# Altium PCB toothxDev.PcbDoc
Units mm, origin at the board's own origin, x right, y up, seen from the top; angles counter-clockwise.
Board outline 90 x 90 mm, 2 copper layers (Top Layer, Bottom Layer); 46 components, 35 nets, 173 pads, 28 vias.
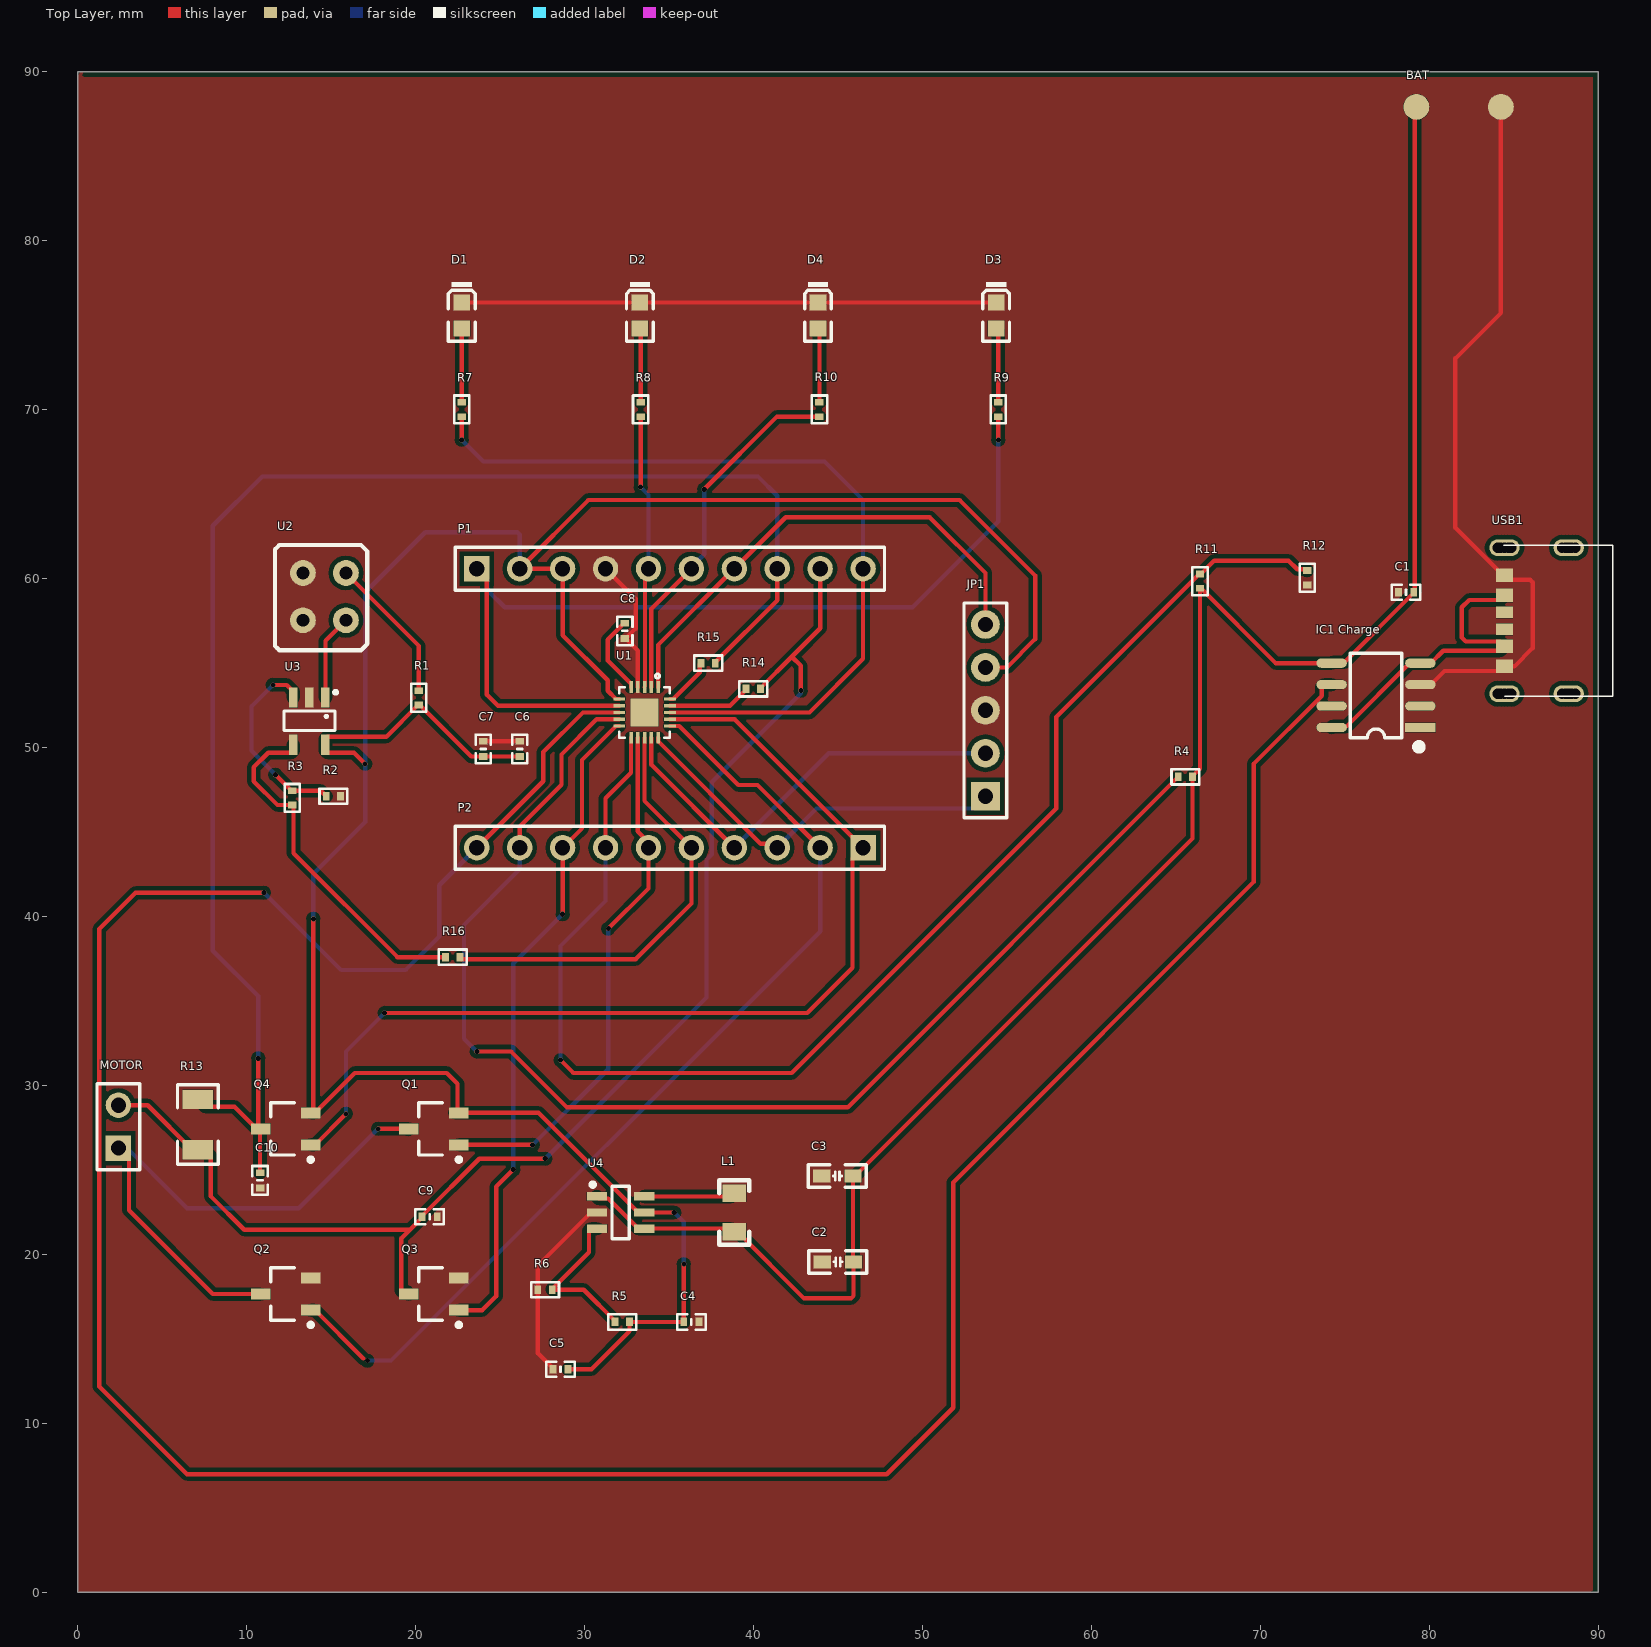
[diagram p0: Top Layer view]
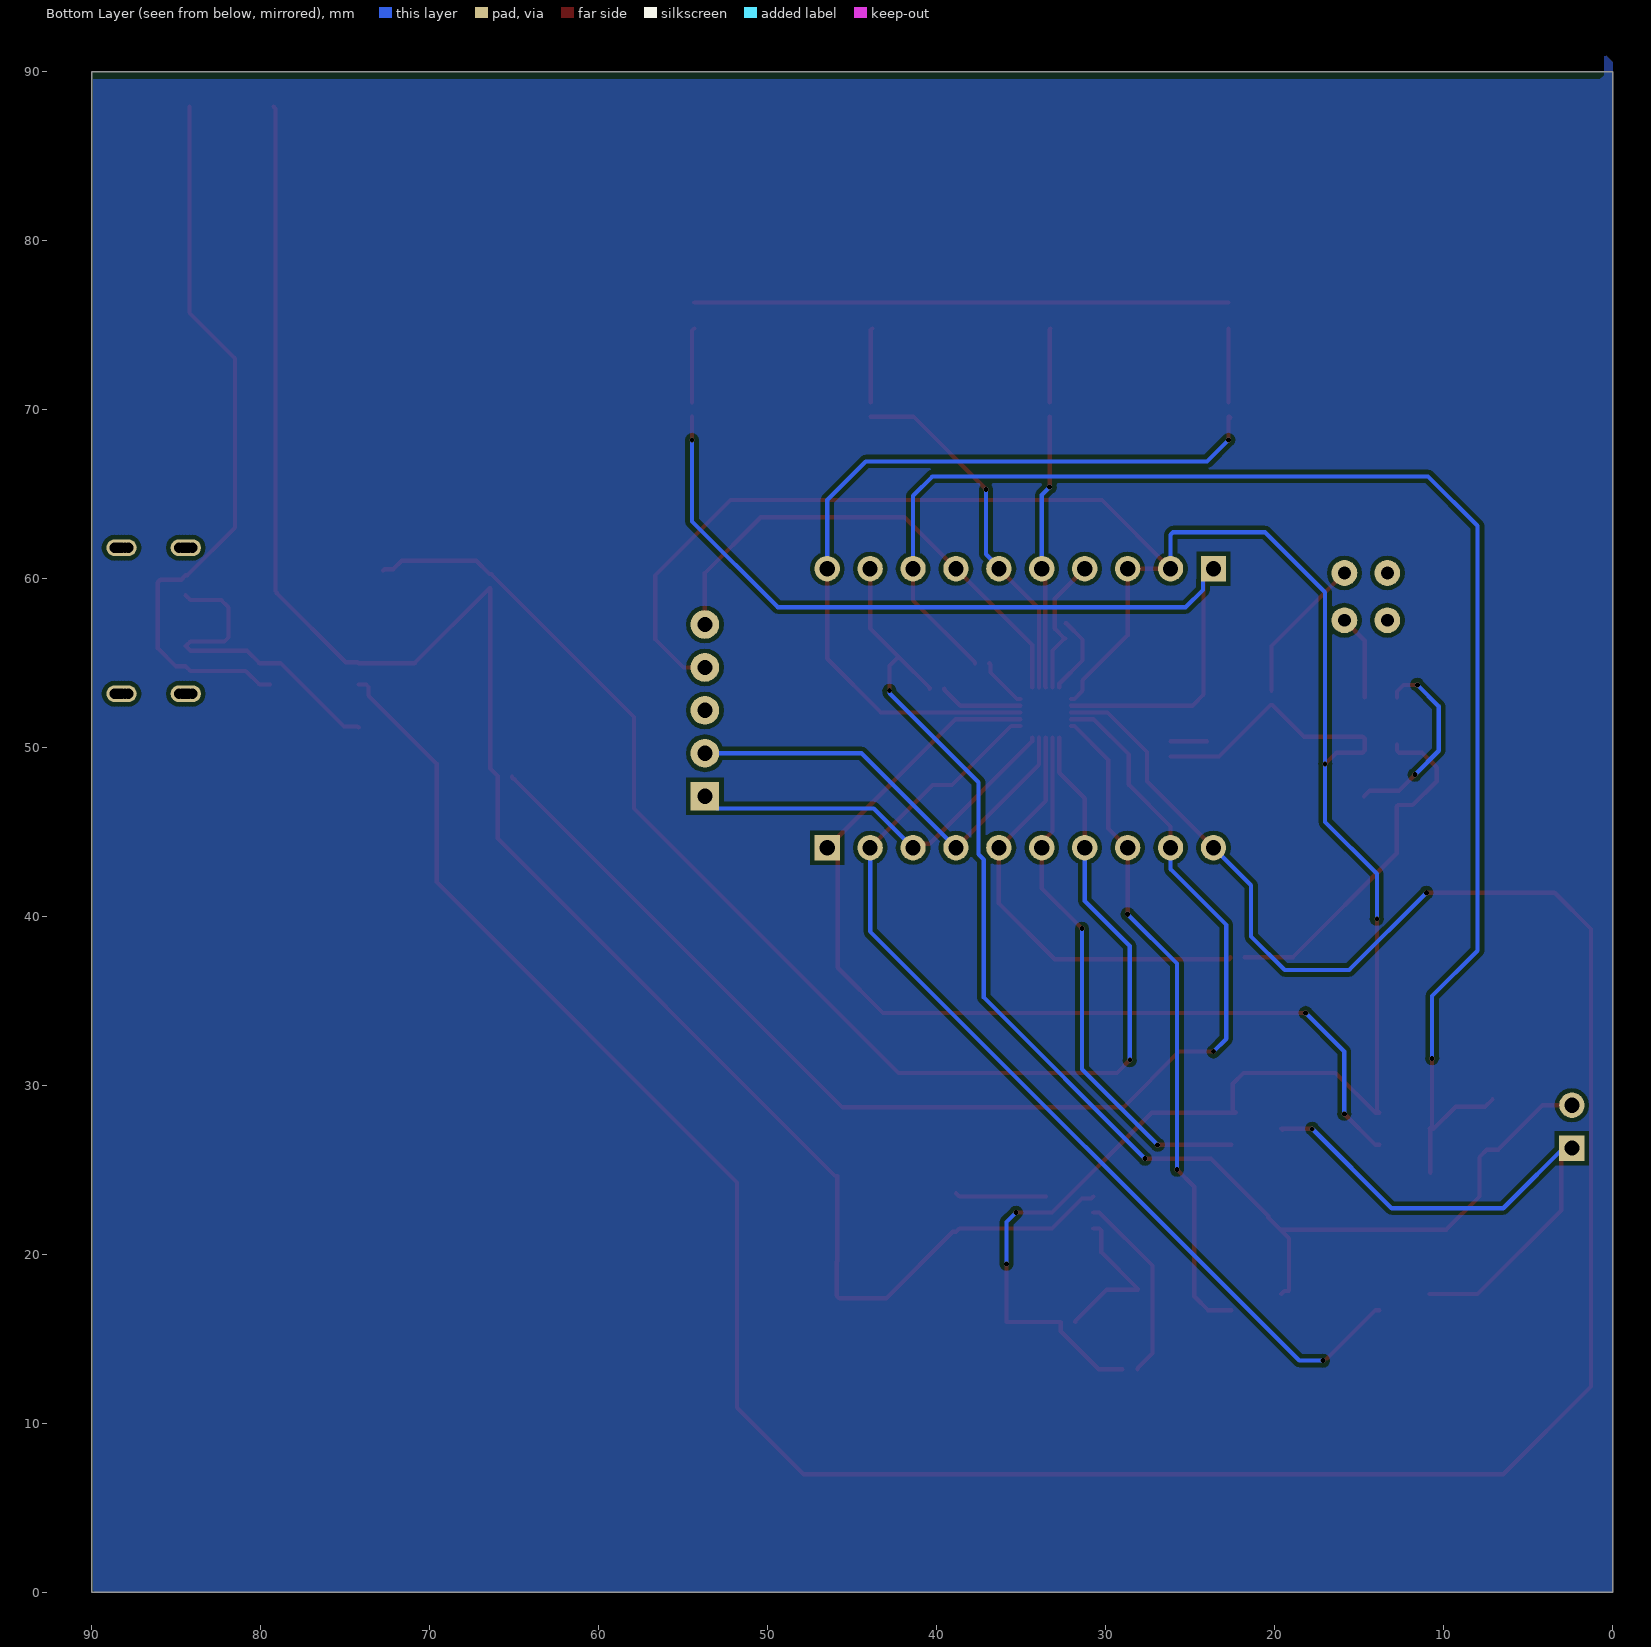
[diagram p1: Bottom Layer view, seen from below]

## Layer stack, top to bottom
Top Solder: solder mask 0.0102, Solder Resist, Dk 3.5
Top Layer: signal copper 0.0356
Dielectric 1: dielectric 0.32, FR-4, Dk 4.8
Bottom Layer: signal copper 0.0356
Bottom Solder: solder mask 0.0102, Solder Resist, Dk 3.5

## Board outline
0,0 90,0 90,90 0,90

## Design rules (kind name [scope] priority, off if disabled: settings)
Clearance [All] p1: gap=0.254 ignorepadtopadclearanceinfootprint=FALSE except(0: Arc-Arc Arc-Track Arc-SMDPad Arc-Hole Track-Track Track-SMDPad Track-Hole SMDPad-SMDPad SMDPad-THPad SMDPad-Via SMDPad-Fill SMDPad-Poly SMDPad-Region SMDPad-Text SMDPad-Hole THPad-Hole Via-Hole Fill-Hole Poly-Hole Region-Hole Text-Hole)
PolygonConnect [All] p1: connectstyle=Direct reliefconductorwidth=0.254 reliefentries=4 polygonreliefangle="90 Angle" airgapwidth=0.254
RoutingVias [All] p1: holewidth=0.711 width=1.27 viastyle="Through Hole" minholewidth=0.711 minwidth=1.27 maxholewidth=0.711 maxwidth=1.27
SolderMaskExpansion [All] p1: expansion=0.102
Width [All] p1: maxlimit=0.254 minlimit=0.254 preferedwidth=0.254
30 further rules are at their usual default settings.

## Components (designator, comment, footprint, x,y, rotation, side; value= is the part's Value field where it differs from the comment)
BAT "Header 2" POWER 79.226,87.909 r0 top
C1 "10uF" "C 0402_L" 78.613,59.182 r0 top
C2 "10uF" "C 0603_M" 44.991,19.558 r0 top
C3 "0.1uF" "C 0603_M" 44.958,24.638 r0 top
C4 "0.1uF" "C 0402_L" 36.322,16.002 r180 top
C5 "22uF" "C 0402_L" 28.575,13.208 r0 top
C6 "1uF" "C 0402_L" 26.162,49.911 r270 top
C7 "10nF" "C 0402_L" 24.003,49.911 r270 top
C8 "47nF" "C 0402_L" 32.385,56.896 r270 top
C9 "100nF (104) 10% 50V" "C 0402_L" 20.828,22.225 r180 top
C10 "100nF (104) 10% 50V" "C 0402_L" 10.795,24.384 r90 top
D1 "白灯 0603" 0603_LED_S1 22.733,75.565 r270 top
D2 "白灯 0603" 0603_LED_S1 33.274,75.565 r270 top
D3 "白灯 0603" 0603_LED_S1 54.356,75.565 r270 top
D4 "白灯 0603" 0603_LED_S1 43.815,75.565 r270 top
"IC1 Charge" "TP4056" SOP8_N 76.835,53.086 r180 top
JP1 "HDR-1X5" HDR2.54-M-LI-5P 53.721,52.197 r90 top
L1 "10uH" "L 0805" 38.862,22.479 r90 top
MOTOR "HDR-1X2" HDR1X2 2.413,26.289 r90 top
P1 "Header 10" HDR1X10 23.622,60.579 r0 top
P2 "Header 10" HDR1X10 46.482,44.069 r180 top
Q1 "AO3401A P道沟 X13A15 SOT-23" SOT-23-3L 21.082,27.432 r0 top
Q2 "AO3400A N道沟 X0YV1T SOT-23" SOT-23-3L 12.319,17.653 r0 top
Q3 "AO3400A N道沟 X0YV1T SOT-23" SOT-23-3L 21.082,17.653 r0 top
Q4 "AO3401A P道沟 X13A15 SOT-23" SOT-23-3L 12.319,27.432 r0 top
R1 "100Ω (1000) ±1%" "R 0402_L" 20.193,52.959 r270 top
R2 "10K" "R 0402_L" 15.113,47.117 r0 top
R3 "90K" "R 0402_L" 12.7,46.99 r90 top
R4 "10K" "R 0402_L" 65.532,48.26 r0 top
R5 "525K" "R 0402_L" 32.258,16.002 r180 top
R6 "100K" "R 0402_L" 27.686,17.907 r180 top
R7 "100Ω (1000) ±1%" "R 0402_L" 22.733,69.977 r90 top
R8 "100Ω (1000) ±1%" "R 0402_L" 33.316,69.977 r90 top
R9 "100Ω (1000) ±1%" "R 0402_L" 54.483,69.977 r90 top
R10 "100Ω (1000) ±1%" "R 0402_L" 43.9,69.977 r90 top
R11 "10K" "R 0402_L" 66.421,59.817 r90 top
R12 "10K" "R 0402_L" 72.771,60.071 r270 top
R13 "0.1Ω (R100) ±1%" 1206_R 7.112,27.686 r270 top
R14 "330Ω (3300) ±1%" "R 0402_L" 40.005,53.467 r180 top
R15 "330Ω (3300) ±1%" "R 0402_L" 37.338,54.991 r180 top
R16 "10K" "R 0402_L" 22.225,37.592 r180 top
U1 "HC32L110_QFN20" WFQFN20-0R4-3X3ER1R65X1R65 33.552,52.07 r270 top
U2 "ITR2001-T" ITR2000 13.335,60.325 r270 top
U3 "LMV321IDBVRG4" SOT23-5N 13.716,51.562 r180 top
U4 "FP6715" SOT23-6N 32.131,22.479 r270 top
USB1 "TYPEC1" TYPE_C_6PIN 86.341,57.5 r90 top

## Footprints (in the part's own frame and the unit in brackets; to place one, negate y for a bottom-side part, rotate by r counter-clockwise, add the part's x,y. Pads: shape width x height; smd on the part's side, far side on the other; paste and mask are expansions set on the pad)
0603_LED_S1 [mm]
  rect 0.93x0.98 smd: A(0.77,0) K(-0.77,0)
  silkscreen extent -1.98,-0.79 1.54,0.79, body extent -0.8,-0.4 0.8,0.4, height 0.6
1206_R [mm]
  rect 1.13x1.8 smd: 1(-1.49,0) 2(1.49,0)
  silkscreen extent -2.35,-1.2 2.35,1.2, body extent -1.7,-0.86 1.65,0.87, height 0.85
"C 0402_L" [mm] "无极性贴片电容"
  rect 0.4x0.5 smd: 1(-0.45,0) 2(0.45,0)
  silkscreen extent -0.85,-0.45 0.85,0.45, body extent -0.5,-0.26 0.5,0.26, height 0.53
"C 0603_M" [mil] "无极性贴片电容"
  rect 40x30 smd: 1(-36.5,0) 2(36.5,0)
  silkscreen extent -67,-26 68,26, body extent -31,-16 31,16, height 32
HDR1X2 [mm] "Connector; Header; 2 Position"
  rect 1.5x1.5 hole 0.9: 1(0,0)
  round 1.5 hole 0.9: 2(2.54,0)
  silkscreen extent -1.27,-1.27 3.81,1.27
HDR1X10 [mm] "Connector; Header; 10 Position"
  rect 1.5x1.5 hole 0.9: 1(0,0)
  round 1.5 hole 0.9: 2(2.54,0) 3(5.08,0) 4(7.62,0) 5(10.16,0) 6(12.7,0) 7(15.24,0) 8(17.78,0) 9(20.32,0) 10(22.86,0)
  silkscreen extent -1.27,-1.27 24.13,1.27
HDR2.54-M-LI-5P [mm] "排母，5脚"
  rect 1.7x1.7 hole 0.9: 1(-5.08,0)
  round 1.7 hole 0.9: 2(-2.54,0) 3(0,0) 4(2.54,0) 5(5.08,0)
  silkscreen extent -6.35,-1.27 6.35,1.27, body extent -6.35,-1.27 6.35,1.27, height 8.5
ITR2000 [mil]
  round 60 hole 30: 1(0,100) 2(0,0) 3(110.24,0) 4(110.24,100)
  silkscreen extent -65,-65 180,150
"L 0805" [mil] "小功率贴片电感"
  rect 40x55 smd: 1(-45,0) 2(45,0)
  silkscreen extent -75,-35 75,35, body extent -39,-24 39,24, height 35
POWER [mil]
  round 60 smd: 1(0,0) 2(196.85,0)
"R 0402_L" [mm] "1/16W贴片电阻"
  rect 0.4x0.5 smd: 1(-0.4,0) 2(0.45,0)
  silkscreen extent -0.8,-0.45 0.85,0.45, body extent -0.5,-0.25 0.5,0.25, height 0.3
SOP8_N [mm] "5*6*1.8mm（长宽高）"
  rect 1.8x0.55 smd: 1(-2.625,1.905)
  oval 1.8x0.55 smd: 2(-2.625,0.635) 3(-2.625,-0.635) 4(-2.625,-1.905) 5(2.625,-1.905) 6(2.625,-0.635) 7(2.625,0.635) 8(2.625,1.905)
  silkscreen extent -2.69,-2.5 1.52,3.2, body extent -3,-2.5 3,2.5, height 1.9
SOT23-5N [mm] "3x1.6x1.1mm(长宽高)"
  rect 0.5x1.2 smd: 1(-0.95,-1.4) 2(0,-1.4) 3(0.95,-1.4) 4(0.95,1.4) 5(-0.95,1.4)
  silkscreen extent -1.63,-1.78 1.5,0.56, body extent -1.5,-1.4 1.5,1.4, height 1.15
SOT23-6N [mm] "3x1.6x1.1mm(长宽高)"
  rect 0.5x1.2 smd: 1(-0.95,-1.4) 2(0,-1.4) 3(0.95,-1.4) 4(0.95,1.4) 5(0,1.4) 6(-0.95,1.4)
  silkscreen extent -1.78,-1.78 1.55,0.51, body extent -1.5,-1.4 1.5,1.4, height 1.15
SOT-23-3L [mm] "http://www.aosmd.com/res/packaging_information/SOT-23-3L.pdf"
  rect 1.15x0.65 smd: 1(1.475,-0.95) 2(1.475,0.95) 3(-1.475,0)
  silkscreen extent -0.9,-1.95 1.6,1.55, body extent -0.9,-1.55 0.9,1.55, height 1.25
TYPE_C_6PIN [mm]
  round 1 hole 0.6: 1(-4.32,1.5) 1(-4.32,1.7) 1(-4.32,1.9) 1(-4.32,2.1) 1(-4.32,2.3) 2(-4.32,-2.3) 2(-4.32,-2.1) 2(-4.32,-1.9) 2(-4.32,-1.7) 2(-4.32,-1.5) 3(4.32,-2.3) 3(4.32,-2.1) 3(4.32,-1.9) 3(4.32,-1.7) 3(4.32,-1.5) 4(4.32,1.5) 4(4.32,1.7) 4(4.32,1.9) 4(4.32,2.1) 4(4.32,2.3)
  rect 0.7x1 smd: A5(-0.5,1.9) B5(0.5,1.9)
  rect 0.8x1 smd: A9(1.5,1.9) A12(2.7,1.9) B9(-1.5,1.9) B12(-2.7,1.9)
  silkscreen extent -4.47,-4.5 4.47,1.95
WFQFN20-0R4-3X3ER1R65X1R65 [mm]
  rect 0.7x0.2 smd mask+0.09: 1(-1.5,0.8) 2(-1.5,0.4) 3(-1.5,0) 4(-1.5,-0.4) 5(-1.5,-0.8) 11(1.5,-0.8) 12(1.5,-0.4) 13(1.5,0) 14(1.5,0.4) 15(1.5,0.8)
  rect 0.2x0.7 smd mask+0.09: 6(-0.8,-1.5) 7(-0.4,-1.5) 8(0,-1.5) 9(0.4,-1.5) 10(0.8,-1.5) 16(0.8,1.5) 17(0.4,1.5) 18(0,1.5) 19(-0.4,1.5) 20(-0.8,1.5)
  rect 1.65x1.65 smd: 21(0,0)
  silkscreen extent -2.29,-1.5 1.5,1.5

## Part data
BAT: "Header, 2-Pin", LatestRevisionDate=17-Jul-2002, LatestRevisionNote="Re-released for DXP Platform.", Publisher="Altium Limited"
C1 C2 C3 C4 C5 C6 C7 C8: library part C, "贴片电容"
C9 C10: library part "0603 100nF (104) 10% 50V", "贴片电容", Package=0603, SuppliersPartNumber=C14663, ComponentLink1Description=供应商, ComponentLink1URL=http://www.szlcsc.com/product/details_15331.html, Supplier=LC
D1 D2 D3 D4: library part "0603 白灯", "发光二极管", Package=0603, SuppliersPartNumber=C2290, ComponentLink1Description=供应商, ComponentLink1URL=http://www.szlcsc.com/product/details_2663.html, Supplier=LC
"IC1 Charge": "锂电池充电管理"
JP1: library part "Header 5", "5P接插件", BOM名称=5P接
L1: library part L, "小功率贴片电感"
MOTOR: library part "Header 2", "2P接插件", BOM名称=2P接
P1 P2: "Header, 10-Pin", LatestRevisionDate=17-Jul-2002, LatestRevisionNote="Re-released for DXP Platform.", Publisher="Altium Limited"
Q1 Q4: "MOS(场效应管)", Package=SOT-23, SuppliersPartNumber=C15127, ComponentLink1Description=供应商, ComponentLink1URL=http://www.szlcsc.com/product/details_15801.html, Supplier=LC
Q2 Q3: "MOS(场效应管)", Package=SOT-23, SuppliersPartNumber=C20917, ComponentLink1Description=供应商, ComponentLink1URL=http://www.szlcsc.com/product/details_21629.html, Supplier=LC
R1 R2 R3 R4 R5 R6 R7 R8 R9 R10 R11 R12 R16: library part "0603 100Ω (1000) 1%", "贴片电阻", Package=0603, SuppliersPartNumber=C22775, ComponentLink1Description=供应商, ComponentLink1URL=http://www.szlcsc.com/product/details_23502.html, Supplier=LC
R13: library part "1206 0.1Ω (R100) 1%", "贴片电阻", Package=1206, SuppliersPartNumber=C25334, ComponentLink1Description=供应商, ComponentLink1URL=http://www.szlcsc.com/product/details_26077.html, Supplier=LC
R14 R15: library part "0603 330Ω (3300) 1%", "贴片电阻", Package=0603, SuppliersPartNumber=C23138, ComponentLink1Description=供应商, ComponentLink1URL=http://www.szlcsc.com/product/details_23865.html, Supplier=LC
U2: library part Component_1
U3: library part LMV321IDBVRG4_[C7972], "运放", Package=SOT-23-5, SuppliersPartNumber=C7972, ComponentLink1Description=供应商, ComponentLink1URL=http://www.szlcsc.com/product/details_8449.html, Supplier=LC
USB1: library part Type-C-6Pin

## Via types
v1: diameter 0.3, hole 0.3, Top Layer to Bottom Layer, 24 vias
v2: diameter 1.27, hole 0.711, Top Layer to Bottom Layer, 4 vias

## Nets (pads, with @x,y where several pads share a name; then routed paths per layer and width w, separated by ;. In a path a pad name is that pad's centre, name@x,y a point inside that pad or via, vN(x,y) a via of type N, cw(c..) or ccw(c..) an arc to the next point about the centre after c; other vN are vias at no path point)
BAT: "IC1 Charge.5" BAT.1 C1.2 C2.2 C3.2 L1.1 R4.2 R11.1 U4.1 U4.4 | length 113.2
  Top Layer w0.254: U4.1 30.854,23.306 31.404,23.306 33.181,21.529 U4.4 38.669,21.529 L1.1 39.052,21.336 42.989,17.399 45.77,17.399 45.918,17.548 C2.2 45.885,19.591 C3.2 46.012,24.638 65.982,44.608 R4.2 65.982,48.31 66.421,48.749 R11.1 66.471,59.417 70.897,54.991 74.21,54.991 74.267,55.048 74.979,55.048 79.063,59.132 C1.2 79.136,59.255 79.136,87.819 BAT.1
BAT_ADC: P2.7 R11.2 R12.1 U1.11 | length 81.3
  Top Layer w0.254: v1(28.575,31.496) 29.337,30.734 42.26,30.734 57.912,46.386 57.912,51.808 66.371,60.267 R11.2 66.471,60.267 67.256,61.052 71.663,61.052 72.171,60.544 72.679,60.544 72.752,60.471 R12.1 ; P2.7 31.242,46.99 32.752,48.5 U1.11
  Bottom Layer w0.254: v1(28.575,31.496) 28.575,38.249 31.242,40.916 P2.7
GND: "IC1 Charge.3" BAT.2 C1.1 C2.1 C3.1 C4.1 C5.1 C6.1 C7.1 C8.2 C9.1 C10.1 D1.K D2.K D3.K D4.K JP1.3 P1.4 Q2.2 Q3.2 R2.2 R6.2 R12.2 U1.4 U2.2 U2.3 U3.2 U4.2 USB1.A12 USB1.B12 | length 96.8
  Top Layer w0.254: D1.K 22.758,76.335 D2.K D4.K D3.K ; C7.1 C6.1 ; C5.1 28.125,13.258 27.236,14.147 R6.2 27.236,19.334 30.381,22.479 U4.2 ; P1.4 33.02,58.801 33.02,57.031 C8.2@32.435,56.446 ; C8.2 C8.2@32.435,56.446 ; U1.4 33.152,55.729 C8.2@32.435,56.446 ; 79.46,53.721 80.085,53.721 80.891,54.527 84.168,54.527 USB1.B12 85.026,54.8 86.104,55.878 86.104,59.778 85.955,59.927 84.714,59.927 USB1.A12 84.341,60.2 81.534,63.006 81.534,73.025 84.226,75.717 BAT.2
  other v2: 13.335,57.525 13.335,60.325
ISHUNT1: C10.2 P1.8 Q4.3 R13.1 R15.1 | length 90.4
  Top Layer w0.254: R13.1 7.55,28.738 9.288,28.738 10.594,27.432 Q4.3 ; v1(10.687,31.604) 10.687,27.589 Q4.3 ; C10.2 10.795,27.383 Q4.3 ; R15.1 37.738,55.041 41.402,58.705 P1.8
  Bottom Layer w0.254: v1(10.687,31.604) 10.687,35.287 8.001,37.973 8.001,63.119 10.922,66.04 40.259,66.04 41.402,64.897 P1.8
ISHUNT2: C9.2 MOTOR.2 P1.9 Q3.3 R13.2 R14.1 | length 80.5
  Top Layer w0.254: MOTOR.2 4.144,28.829 6.777,26.196 R13.2 7.447,26.196 7.885,25.758 7.885,23.434 9.856,21.463 19.666,21.463 ; Q3.3 19.431,17.829 19.181,17.829 19.159,17.851 19.159,20.956 19.666,21.463 ; C9.2@20.378,22.175 19.666,21.463 ; C9.2 20.378,22.275 23.769,25.666 v1(27.674,25.666) ; R14.1 40.405,53.517 42.26,55.372 ; v1(42.799,53.359) 42.799,54.833 42.26,55.372 ; P1.9 43.942,57.054 42.26,55.372
  Bottom Layer w0.254: v1(27.674,25.666) 37.211,35.203 37.211,43.359 37.529,43.676 37.529,47.943 42.799,53.213 v1(42.799,53.359)
ITRADC: P2.5 R16.1 U1.13 | length 26.1
  Top Layer w0.254: R16.1 22.625,37.542 22.698,37.469 22.748,37.469 22.752,37.465 33.02,37.465 36.322,40.767 P2.5 33.552,46.839 U1.13
LED1: P1.10 R7.1 U1.18 | length 48.9
  Top Layer w0.254: R7.1@22.625,69.504 22.698,69.577 R7.1 v1(22.733,68.199) ; U1.18 43.307,52.07 46.482,55.245 P1.10
  Bottom Layer w0.254: v1(22.733,68.199) 24.003,66.929 44.196,66.929 46.482,64.643 P1.10
LED2: P1.5 R8.1 U1.3 | length 16.3
  Top Layer w0.254: v1(33.316,65.405) R8.1 ; U1.3 33.579,53.597 33.579,60.376 P1.5
  Bottom Layer w0.254: v1(33.316,65.405) 33.782,64.939 P1.5
LED3: P1.1 R9.1 U1.7 | length 56.3
  Top Layer w0.254: P1.1 24.216,59.985 24.216,53.127 24.873,52.47 U1.7 ; v1(54.483,68.199) R9.1
  Bottom Layer w0.254: P1.1 24.245,59.956 24.245,59.321 25.273,58.293 49.403,58.293 54.483,63.373 v1(54.483,68.199)
LED4: P1.6 R10.1 U1.2 | length 21.6
  Top Layer w0.254: U1.2 33.952,58.209 P1.6 ; v1(37.084,65.278) 41.383,69.577 R10.1
  Bottom Layer w0.254: P1.6 36.322,60.672 37.084,61.434 v1(37.084,65.278)
NetC8_1: C8.1 U1.5 | length 4.8
  Top Layer w0.254: C8.1 32.335,57.346 31.369,56.38 31.369,55.149 32.752,53.766 U1.5
NetD1_A: D1.A R7.2 | length 4.4
  Top Layer w0.254: R7.2 D1.A
NetD2_A: D2.A R8.2 | length 4.4
  Top Layer w0.254: D2.A 33.316,74.753 R8.2
NetD3_A: D3.A R9.2 | length 4.4
  Top Layer w0.254: D3.A 54.483,74.668 R9.2
NetD4_A: D4.A R10.2 | length 4.4
  Top Layer w0.254: D4.A 43.9,74.71 R10.2
NetL1_2: L1.2 U4.6 | length 5.4
  Top Layer w0.254: U4.6 38.669,23.429 L1.2
NetMOTOR_1: MOTOR.1 Q1.3 Q2.3 | length 35.2
  Top Layer w0.254: MOTOR.1 3.036,25.666 3.036,22.618 8.001,17.653 Q2.3 ; v1(17.78,27.432) Q1.3 Q1.3@19.558,27.383
  Bottom Layer w0.254: MOTOR.1 2.413,26.797 6.477,22.733 13.081,22.733 v1(17.78,27.432)
NetR1_1: R1.1 U2.1 | length 8.8
  Top Layer w0.254: v2(15.875,60.325) 20.193,56.007 R1.1
NetR2_1: R2.1 R3.2 U3.3 | length 11.7
  Top Layer w0.254: v1(11.557,53.702) 12.376,53.702 12.766,53.312 U3.3 ; v1(11.703,48.387) 12.65,47.44 R3.2 14.39,47.44 R2.1
  Bottom Layer w0.254: v1(11.557,53.702) 10.287,52.432 10.287,49.803 v1(11.703,48.387)
NetR3_1: R3.1 R16.2 U3.4 | length 21.2
  Top Layer w0.254: U3.4 12.766,49.812 12.643,49.689 11.277,49.689 10.414,48.826 10.414,48.006 11.83,46.59 R3.1 12.773,46.517 12.773,43.742 18.923,37.592 R16.2
NetR5_2: R5.2 R6.1 U4.3 | length 9.5
  Top Layer w0.254: U4.3 30.381,21.529 30.258,21.406 30.258,20.129 28.086,17.957 R6.1 29.953,17.907 31.808,16.052 R5.2
NetR14_2: R14.2 U1.19 | length 4.9
  Top Layer w0.254: U1.19 38.608,52.47 39.555,53.417 R14.2
NetR15_2: R15.2 U1.20 | length 3
  Top Layer w0.254: U1.20 35.248,52.87 36.815,54.437 36.815,54.918 R15.2
NetU2_3: U2.4 U3.1 | length 5.1
  Top Layer w0.254: U3.1 14.666,56.316 v2(15.875,57.525)
P23: P2.8 Q3.1 U1.10 | length 39.4
  Top Layer w0.254: Q3.1 23.942,16.703 24.765,17.526 24.765,24.003 v1(25.781,25.019) ; v1(28.702,40.132) P2.8 29.845,45.212 29.845,49.259 31.856,51.27 U1.10
  Bottom Layer w0.254: v1(25.781,25.019) 25.781,37.211 v1(28.702,40.132)
P25: P2.6 Q1.1 U1.12 | length 31.6
  Top Layer w0.254: Q1.1 v1(26.924,26.482) ; v1(31.404,39.278) 33.782,41.656 P2.6 33.782,44.406 33.152,45.036 U1.12
  Bottom Layer w0.254: v1(26.924,26.482) 31.404,30.962 v1(31.404,39.278)
P32: P2.2 Q2.1 U1.16 | length 58.4
  Top Layer w0.254: Q2.1 14.044,16.703 16.904,13.843 ; U1.16 35.598,51.27 39.093,47.775 40.236,47.775 P2.2
  Bottom Layer w0.254: v1(17.145,13.716) 18.542,13.716 43.942,39.116 P2.2
P33: P2.1 Q4.1 U1.17 | length 60.5
  Top Layer w0.254: Q4.1 14.044,26.482 v1(15.883,28.321) ; v1(18.161,34.29) 43.18,34.29 45.859,36.969 45.859,43.446 P2.1 38.881,51.67 U1.17
  Bottom Layer w0.254: v1(15.883,28.321) 15.883,32.012 v1(18.161,34.29)
RST: JP1.5 P1.7 U1.1 | length 29.4
  Top Layer w0.254: U1.1 34.352,56.069 P1.7 41.91,63.627 50.419,63.627 53.721,60.325 JP1.5
STAT: P2.9 R4.1 U1.9 | length 75.6
  Top Layer w0.254: v1(23.622,32.004) 25.654,32.004 28.956,28.702 45.574,28.702 65.009,48.137 65.059,48.137 65.132,48.21 R4.1 ; P2.9 26.162,45.325 28.629,47.792 28.629,49.584 30.715,51.67 U1.9
  Bottom Layer w0.254: v1(23.622,32.004) 22.86,32.766 22.86,39.497 26.162,42.799 P2.9
STDBY: "IC1 Charge.6" P2.10 U1.8 | length 176.4
  Top Layer w0.254: v1(11.023,41.402) 3.429,41.402 1.282,39.255 1.282,12.18 6.477,6.985 47.879,6.985 51.816,10.922 51.816,24.257 69.594,42.035 69.594,49.028 73.631,53.065 73.631,53.584 73.767,53.721 74.21,53.721 ; P2.10 27.559,48.006 27.559,49.726 29.903,52.07 U1.8
  Bottom Layer w0.254: v1(11.023,41.402) 15.595,36.83 19.409,36.83 21.396,38.817 21.396,41.843 P2.10
SWC: JP1.1 P2.3 U1.15 | length 23.4
  Top Layer w0.254: U1.15 34.352,50.374 40.419,44.307 41.164,44.307 P2.3
  Bottom Layer w0.254: P2.3 43.727,46.394 52.998,46.394 JP1.1
SWD: JP1.2 P2.4 U1.14 | length 25.7
  Top Layer w0.254: U1.14 33.952,48.979 P2.4
  Bottom Layer w0.254: P2.4 44.45,49.657 JP1.2
VBUS: "IC1 Charge.4" "IC1 Charge.8" USB1.A9 USB1.B9 | length 19.6
  Top Layer w0.254: 74.21,51.181 74.267,51.238 75.082,51.238 78.835,54.991 79.46,54.991 80.085,54.991 80.821,55.727 84.168,55.727 USB1.B9 84.168,56.273 82.15,56.273 81.915,56.508 81.915,58.293 82.349,58.727 84.168,58.727 USB1.A9
VCC: C4.2 C5.2 C6.2 C7.2 JP1.4 P1.2 P1.3 Q1.2 Q4.2 R1.2 R5.1 U1.6 U3.5 U4.5 | length 157.2
  Top Layer w0.254: v1(13.951,39.859) 13.951,28.539 Q4.2 14.044,28.382 16.396,30.734 21.844,30.734 22.479,30.099 22.479,28.554 22.307,28.382 Q1.2 27.278,28.382 33.181,22.479 U4.5 v1(35.306,22.479) ; v1(17.018,49.022) 16.351,49.689 14.789,49.689 14.666,49.812 U3.5 14.666,50.512 14.789,50.635 18.269,50.635 20.143,52.509 R1.2 20.243,52.509 23.291,49.461 C7.2 C6.2 ; C5.2 30.411,13.208 32.658,15.455 R5.1 C4.2 v1(35.872,19.431) ; U1.6 31.856,52.87 31.369,53.357 31.369,53.975 28.702,56.642 P1.3 P1.2 30.226,64.643 52.197,64.643 56.664,60.176 56.664,56.41 54.991,54.737 JP1.4
  Bottom Layer w0.254: v1(13.951,39.859) 13.951,42.526 17.018,45.593 v1(17.018,49.022) 17.018,59.182 20.574,62.738 26.013,62.738 26.162,62.589 P1.2 ; v1(35.306,22.479) 35.872,21.913 v1(35.872,19.431)
pads on no net: "IC1 Charge.1" "IC1 Charge.2" "IC1 Charge.7" U1.21 USB1.1 USB1.2 USB1.3 USB1.4 USB1.A5 USB1.B5

## Polygon pours and split planes (outlines as drawn)
GND on Top Layer (solid, pour order 4): 0.254,89.789 0.381,89.662 89.662,89.662 89.662,0.127 89.535,0 0,0 0,89.789 0.508,90.297
no net on Bottom Layer (solid, pour order 6): 0.508,89.789 0.762,89.535 89.916,89.535 89.916,0.127 89.789,0 0,0 0,90.551 0.508,91.059

## Silkscreen, mask and mechanical layers (free items; w line width, h text height)
Mechanical 1:
  the board outline again, w0.2